# EAGLE board m121-Kompetenzen (EAGLE 9.7.0)

Size 263.55 x 98.99 mm. Coordinates in mm from the lower left corner, seen from the top.
Outline: 0,0 263.55,0 263.55,98.99 0,98.99 0,0
Copper layers (1*16): Top 0.035mm / dielectric 1.5mm / Bottom 0.035mm
Design rules "default": minimum track width 6mil, minimum drill 0.35mm, track to track 6mil, track to pad 6mil, pad to pad 6mil, via to via 6mil, smd to smd 6mil, copper to edge 40mil, drill to drill 6mil, minimum pad ring 10mil, minimum via ring 8mil, stop-mask expansion 4mil, vias tented up to drill 0mil, thermal gap 10mil

## Footprints (pad centres in the part's own frame; a part is rotated, then mirrored left to right if it is on the bottom)
LEDRD254W60D565H860B = drill 0.981 pad 1.581: 1 -1.27,0; 2 1.27,0
LEDRD254W60D565H860B_B = drill 0.981 pad 1.581: 1 -1.27,0; 2 1.27,0
LEDRD254W60D565H860B_G = drill 0.981 pad 1.581: 1 -1.27,0; 2 1.27,0
RESAD1016W63L850D250B = drill 0.83 pad 1.43: 1 -5.08,0; 2 5.08,0
HA-06-SM065 = drill 1 pad 1.676: 1 -2.54,-2.54; 2 0,2.54; 3 2.54,-2.54
SWITCH-MOMENTARY-PTH-6.5MM = drill 1.016 pad 1.88: 1 -3.251,2.261; 2 3.251,2.261; 3 -3.251,-2.261; 4 3.251,-2.261
JHD-162A = drill 1.016 long: 1 -19.05,0; 2 -16.51,0; 3 -13.97,0; 4 -11.43,0; 5 -8.89,0; 6 -6.35,0; 7 -3.81,0; 8 -1.27,0; 9 1.27,0; 10 3.81,0; 11 6.35,0; 12 8.89,0; 13 11.43,0; 14 13.97,0; 15 16.51,0; 16 19.05,0
ARDUINO-UNO-R3-SHIELD = drill 1.016 pad 1.88: 3.3V 24.13,-2.54; 5V 24.13,0; A0 24.13,12.7; A1 24.13,15.24; A2 24.13,17.78; A3 24.13,20.32; A4 24.13,22.86; A5 24.13,25.4; AREF -24.13,-13.97; D2 -24.13,20.32; D3 -24.13,17.78; D4 -24.13,15.24; D5 -24.13,12.7; D6 -24.13,10.16; D7 -24.13,7.62; D8 -24.13,3.81; D9 -24.13,1.27; D10 -24.13,-1.27; D11 -24.13,-3.81; D12 -24.13,-6.35; D13 -24.13,-8.89; GND@0 24.13,2.54; GND@1 24.13,5.08; GND@2 -24.13,-11.43; IOREF 24.13,-7.62; NC 24.13,-10.16; RES 24.13,-5.08; RX -24.13,25.4; SCL -24.13,-19.05; SDA -24.13,-16.51; TX -24.13,22.86; VIN 24.13,7.62

## Placement (x,y rotation side)
D1  RED  [LEDRD254W60D565H860B]  205.76,58.87 180 top
D2  BLUE  [LEDRD254W60D565H860B_B]  213.38,58.87 180 top
D3  GREEN  [LEDRD254W60D565H860B_G]  221,58.87 180 top
R2  220  [RESAD1016W63L850D250B]  151.47,84.26 270 top
R4  10k  [RESAD1016W63L850D250B]  240.05,66.49 90 top
R5  220  [RESAD1016W63L850D250B]  207.03,69.03 90 top
R6  220  [RESAD1016W63L850D250B]  214.65,69.03 90 top
R7  220  [RESAD1016W63L850D250B]  222.27,69.03 90 top
R8  10k  [RESAD1016W63L850D250B]  252.75,66.49 90 top
RPOT2  250k  [HA-06-SM065]  110.83,58.86 0 top
S1  SWITCH_MOMENTARY  [SWITCH-MOMENTARY-PTH-6.5MM]  255.29,75.38 90 top
S2  SWITCH_MOMENTARY  [SWITCH-MOMENTARY-PTH-6.5MM]  242.59,75.38 90 top
U4  LCD-16X2JHD-162A  [JHD-162A]  132.76,36.63 0 top
UARDUINO  ARDUINO-UNO-R3-SHIELD  [ARDUINO-UNO-R3-SHIELD]  47.88,69.14 270 top

## Library data of the parts
D1 = Tinkercad; CATEGORY: Opto-Electronic; SUB-CATEGORY: LED; VALUE: LED_RED
D2 = Tinkercad; CATEGORY: Opto-Electronic; SUB-CATEGORY: LED; VALUE: LED_BLUE
D3 = Tinkercad; CATEGORY: Opto-Electronic; SUB-CATEGORY: LED; VALUE: LED_GREEN
R2 R4-R8 RPOT2 S1 S2 U4 UARDUINO = Tinkercad

## Nets
D1_A: D1.1 R5.1
D2_A: D2.1 R6.1
D3_A: D3.1 R7.1
U4_LED+: R2.2 U4.15
U4_VO: RPOT2.2 U4.3
UARDUINO_5V: R2.1 RPOT2.1 S1.3 S1.4 S2.3 S2.4 U4.2 UARDUINO.5V
UARDUINO_D2: U4.14 UARDUINO.D2
UARDUINO_D3: U4.13 UARDUINO.D3
UARDUINO_D4: U4.12 UARDUINO.D4
UARDUINO_D5: U4.11 UARDUINO.D5
UARDUINO_D6: R5.2 UARDUINO.D6
UARDUINO_D7: R6.2 UARDUINO.D7
UARDUINO_D8: R7.2 UARDUINO.D8
UARDUINO_D9: R4.2 S2.1 S2.2 UARDUINO.D9
UARDUINO_D10: R8.2 S1.1 S1.2 UARDUINO.D10
UARDUINO_D11: U4.6 UARDUINO.D11
UARDUINO_D12: U4.4 UARDUINO.D12
UARDUINO_GND: D1.2 D2.2 D3.2 R4.1 R8.1 RPOT2.3 U4.1 U4.5 U4.16 UARDUINO.GND@0 UARDUINO.GND@1 UARDUINO.GND@2

## Tracks (layer width: path | path; a pad name or v marks a point on that pad's centre or on a via)
D1_A  (1 unrouted)
D2_A  (1 unrouted)
D3_A  (1 unrouted)
U4_LED+  (1 unrouted)
U4_VO  (1 unrouted)
UARDUINO_5V  (7 unrouted)
UARDUINO_D2  (1 unrouted)
UARDUINO_D3  (1 unrouted)
UARDUINO_D4  (1 unrouted)
UARDUINO_D5  (1 unrouted)
UARDUINO_D6  (1 unrouted)
UARDUINO_D7  (1 unrouted)
UARDUINO_D8  (1 unrouted)
UARDUINO_D9  (3 unrouted)
UARDUINO_D10  (3 unrouted)
UARDUINO_D11  (1 unrouted)
UARDUINO_D12  (1 unrouted)
UARDUINO_GND  (11 unrouted)